# EAGLE board メイン回路１ (EAGLE 9.6.2)
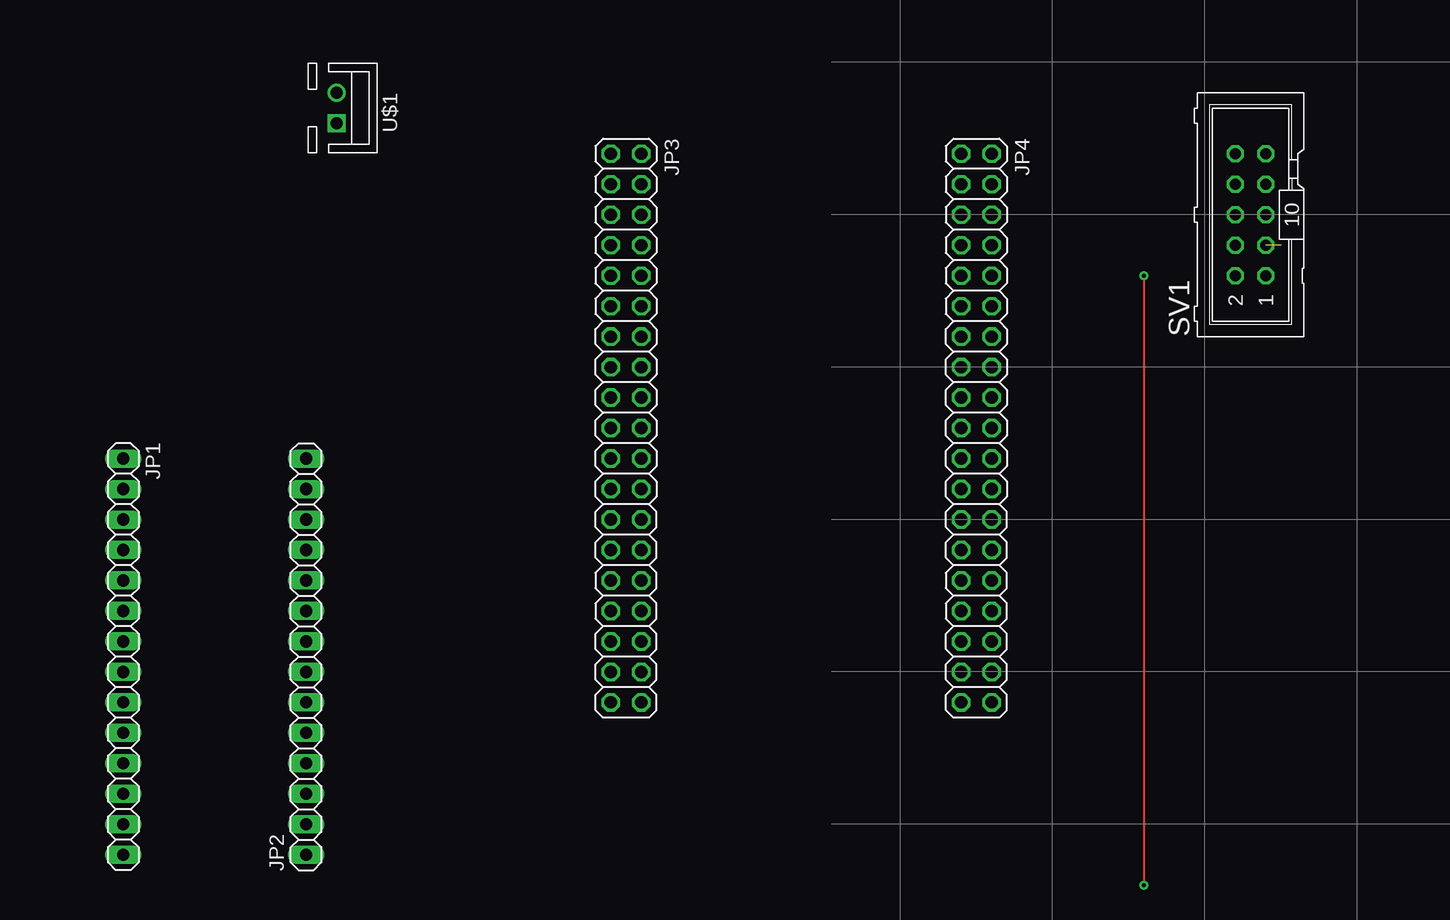
[diagram p0: board, top side]
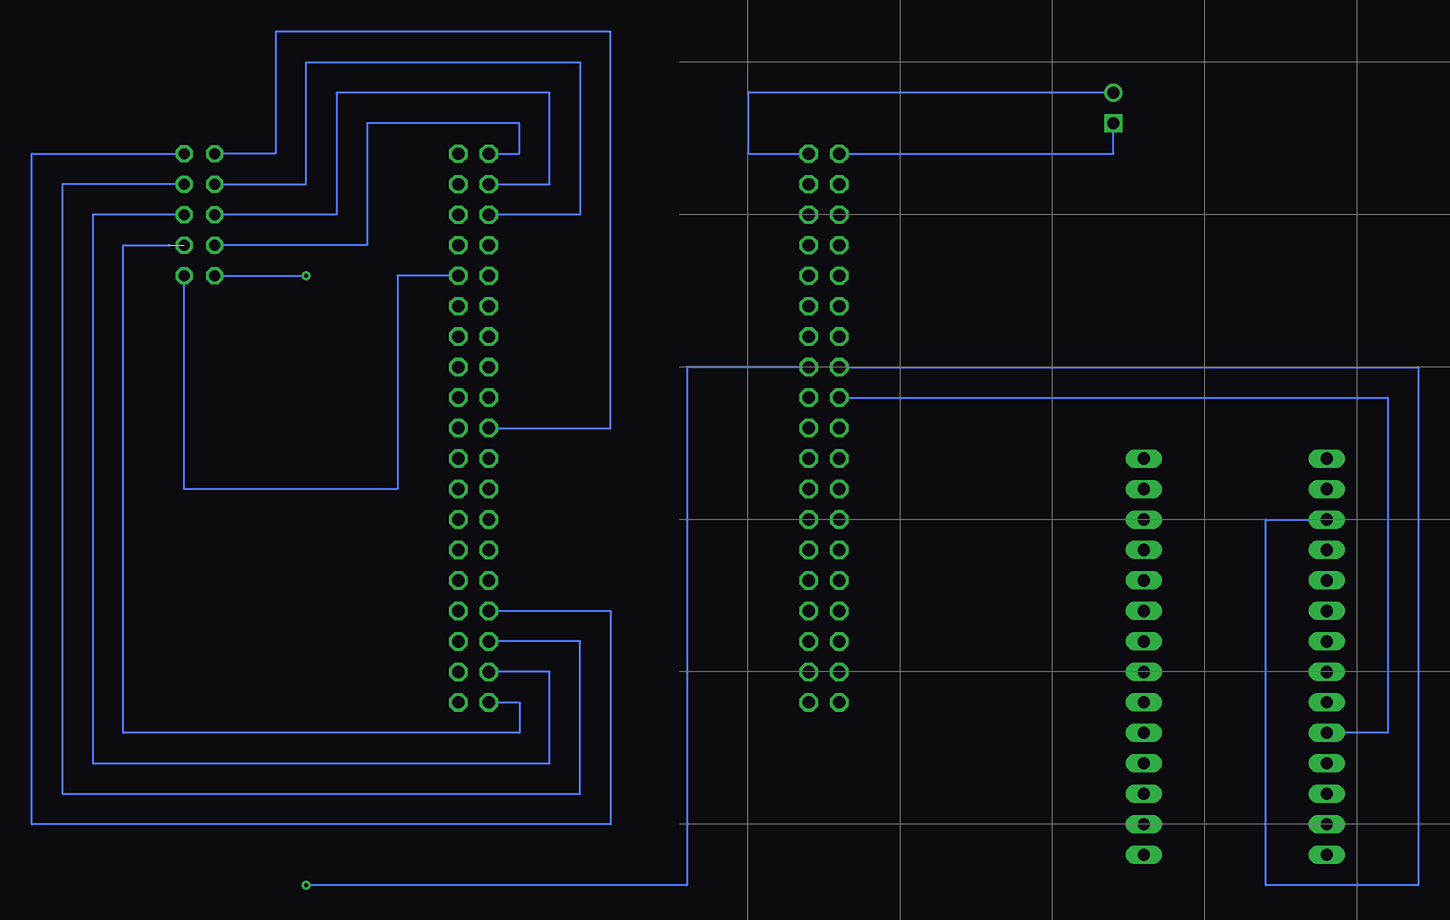
[diagram p1: board, bottom side, seen from below]

No outline drawn. Coordinates in mm, seen from the top.
Copper layers (1*16): Top 0.035mm / dielectric 1.5mm / Bottom 0.035mm
Design rules "default": minimum track width 6mil, minimum drill 0.35mm, track to track 6mil, track to pad 6mil, pad to pad 6mil, via to via 6mil, smd to smd 6mil, copper to edge 40mil, drill to drill 6mil, minimum pad ring 10mil, minimum via ring 8mil, stop-mask expansion 4mil, vias tented up to drill 0mil, thermal gap 10mil

## Footprints (pad centres in the part's own frame; a part is rotated, then mirrored left to right if it is on the bottom)
1X14 = drill 1.016 long: 1 -16.51,0; 2 -13.97,0; 3 -11.43,0; 4 -8.89,0; 5 -6.35,0; 6 -3.81,0; 7 -1.27,0; 8 1.27,0; 9 3.81,0; 10 6.35,0; 11 8.89,0; 12 11.43,0; 13 13.97,0; 14 16.51,0
2X19 = drill 1.016 octagon: 1 -22.86,-1.27; 2 -22.86,1.27; 3 -20.32,-1.27; 4 -20.32,1.27; 5 -17.78,-1.27; 6 -17.78,1.27; 7 -15.24,-1.27; 8 -15.24,1.27; 9 -12.7,-1.27; 10 -12.7,1.27; 11 -10.16,-1.27; 12 -10.16,1.27; 13 -7.62,-1.27; 14 -7.62,1.27; 15 -5.08,-1.27; 16 -5.08,1.27; 17 -2.54,-1.27; 18 -2.54,1.27; 19 0,-1.27; 20 0,1.27; 21 2.54,-1.27; 22 2.54,1.27; 23 5.08,-1.27; 24 5.08,1.27; 25 7.62,-1.27; 26 7.62,1.27; 27 10.16,-1.27; 28 10.16,1.27; 29 12.7,-1.27; 30 12.7,1.27; 31 15.24,-1.27; 32 15.24,1.27; 33 17.78,-1.27; 34 17.78,1.27; 35 20.32,-1.27; 36 20.32,1.27; 37 22.86,-1.27; 38 22.86,1.27
ML10 = drill 0.914 octagon: 1 -5.08,-1.27; 2 -5.08,1.27; 3 -2.54,-1.27; 4 -2.54,1.27; 5 0,-1.27; 6 0,1.27; 7 2.54,-1.27; 8 2.54,1.27; 9 5.08,-1.27; 10 5.08,1.27
B2B-XH = drill 1 square: 1 1.27,0 | drill 1: 2 -1.27,0

## Placement (x,y rotation side)
JP1  [1X14]  0,29.21 270 top
JP2  [1X14]  15.24,29.21 90 top
JP3  [2X19]  41.91,48.26 270 top
JP4  [2X19]  71.12,48.26 270 top
SV1  [ML10]  93.98,66.04 90 top
U$1  02-JST  [B2B-XH]  17.78,74.93 270 top
U$2  [TYPE.B]  -15.24,2.54 90 bottom
U$3  [TYPE.B]  128.27,2.54 90 top

## Library data of the parts
JP1-JP4 = pinhead
SV1 = con-ml; OC_FARNELL: unknown; OC_NEWARK: unknown
U$1 = con-jst-xh (1)
U$2 U$3 = prototyping-board (2)

## Nets
N$1: JP4.1 SV1.4
N$2: JP4.3 SV1.6
N$3: JP4.5 SV1.8
N$4: JP4.19 SV1.10
N$5: JP4.37 SV1.3
N$6: JP4.35 SV1.5
N$7: JP4.33 SV1.7
N$8: JP4.31 SV1.9
N$10: JP4.10 SV1.1
N$11: JP3.16 SV1.2
N$12: JP3.2 U$1.2
N$13: JP3.1 U$1.1
N$14: JP1.3 JP3.15
N$15: JP1.10 JP3.17

## Tracks (layer width: path | path; a pad name or v marks a point on that pad's centre or on a via)
N$1
  Bottom 0.152: JP4.1 67.31,71.12 67.31,73.66 80.01,73.66 80.01,63.5 SV1.4
N$2
  Bottom 0.152: JP4.3 64.77,68.58 64.77,76.2 82.55,76.2 82.55,66.04 SV1.6
N$3
  Bottom 0.152: SV1.8 85.09,68.58 85.09,78.74 62.23,78.74 62.23,66.04 JP4.5
N$4
  Bottom 0.152: JP4.19 59.69,48.26 59.69,81.28 87.63,81.28 87.63,71.12 SV1.10
N$5  (1 unrouted)
  Bottom 0.152: JP4.37 67.31,25.4 67.31,22.86 100.33,22.86 100.33,63.5 96.52,63.5
N$6
  Bottom 0.152: SV1.5 102.87,66.04 102.87,20.32 64.77,20.32 64.77,27.94 JP4.35
N$7
  Bottom 0.152: JP4.33 62.23,30.48 62.23,17.78 105.41,17.78 105.41,68.58 SV1.7
N$8
  Bottom 0.152: JP4.31 59.69,33.02 59.69,15.24 107.95,15.24 107.95,71.12 SV1.9
N$10
  Bottom 0.152: JP4.10 77.47,60.96 77.47,43.18 95.25,43.18 SV1.1
N$11  (via drill 0.35)
  Top 0.152: v85.09,60.96 v85.09,10.16
  Bottom 0.152: SV1.2 v85.09,60.96 | JP3.16 53.34,53.34 53.34,10.16 v85.09,10.16
N$12
  Bottom 0.152: U$1.2 48.26,76.2 48.26,71.12 JP3.2
N$13
  Bottom 0.152: JP3.1 17.78,71.12 U$1.1
N$14
  Bottom 0.152: JP3.15 -7.62,53.34 -7.62,10.16 5.08,10.16 5.08,40.64 JP1.3
N$15
  Bottom 0.152: JP3.17 -5.08,50.8 -5.08,22.86 JP1.10